# Altium PCB MCD_Rev2.PcbDoc (part 2 of 2)
Units mm, origin at the board's own origin, x right, y up, seen from the top; angles counter-clockwise.
Board outline 196.3 x 114.66 mm, 2 copper layers (F.Cu, B.Cu); 76 components, 120 nets, 473 pads, 223 vias.
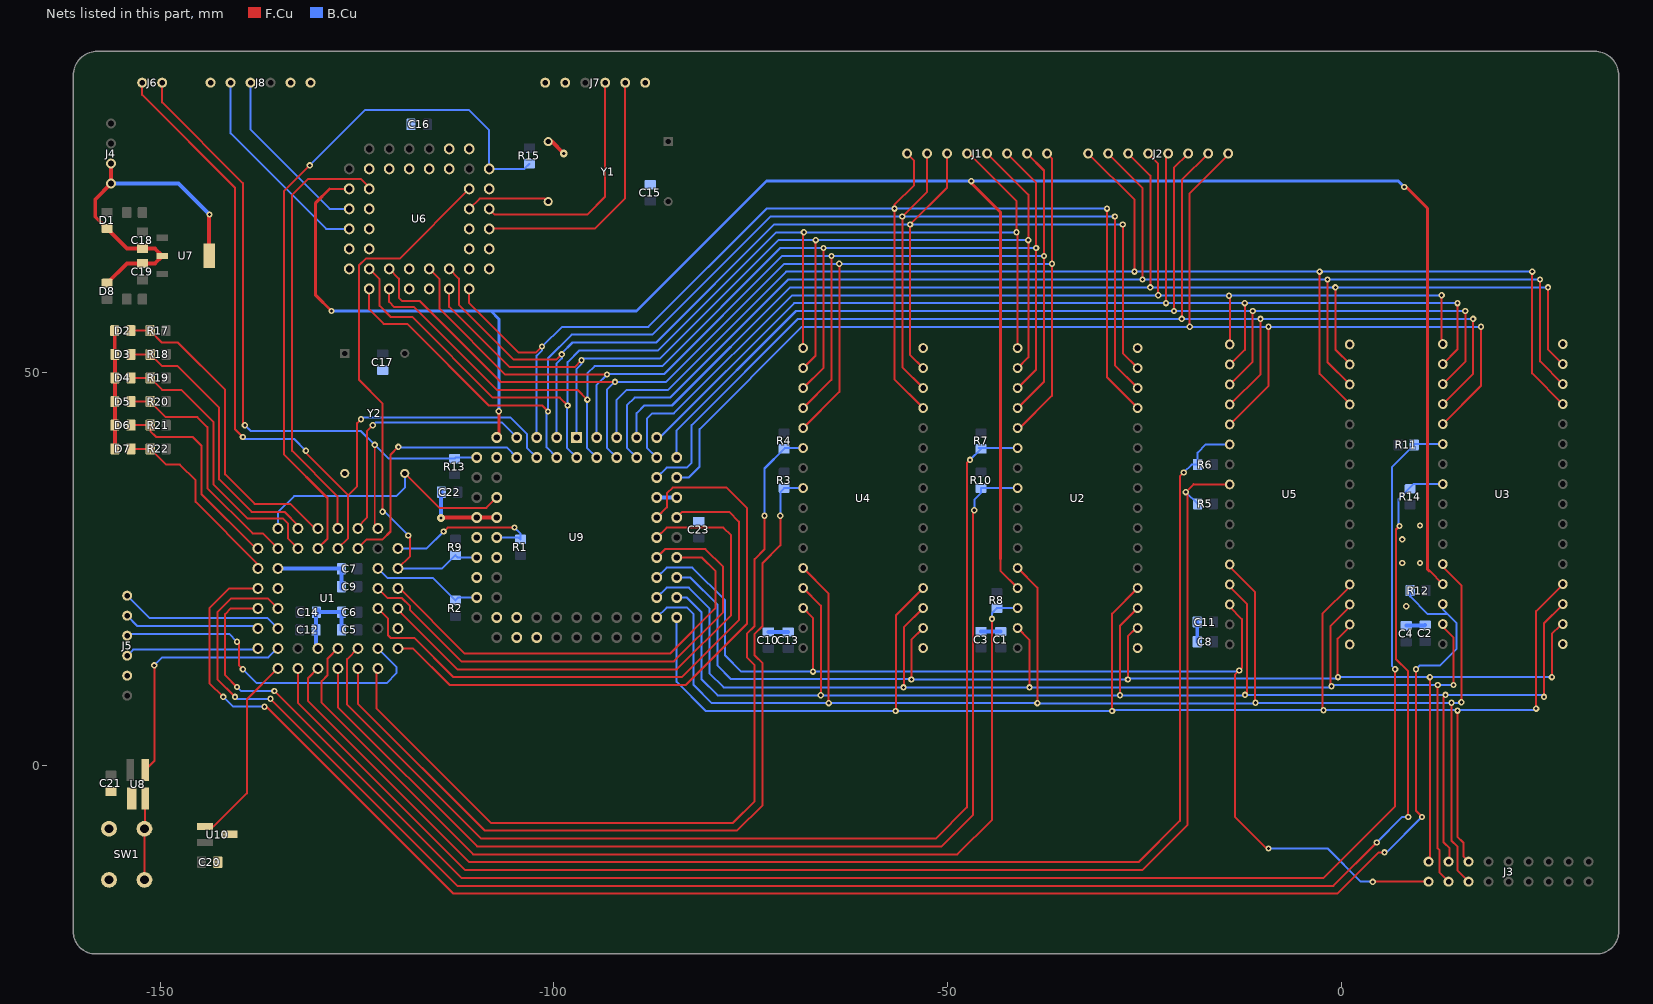
[diagram p2: the nets of this part, all layers, seen from the top]

## Via types
v1: diameter 0.8, hole 0.4, F.Cu to B.Cu, tented both sides, 206 vias
v2: diameter 1, hole 0.5, F.Cu to B.Cu, tented both sides, 13 vias
v3: diameter 1, hole 0.4, F.Cu to B.Cu, tented both sides, 4 vias

## Nets (pads, with @x,y where several pads share a name; then routed paths per layer and width w, separated by ;. In a path a pad name is that pad's centre, name@x,y a point inside that pad or via, vN(x,y) a via of type N, cw(c..) or ccw(c..) an arc to the next point about the centre after c; other vN are vias at no path point) (continued)
A13: J3.13 U2.4 U3.4 U4.4 U5.4 U9.44 | length 207
  F.Cu w0.25: v1(14.75,7) 14.75,-9 15.5,-9.75 15.5,-11.511 J3.13@16.17,-12.181
  F.Cu w0.254: v1(-56.6,6.95) -56.547,7.003 -56.547,19.123 U4.4@-53.1,22.57 ; v1(-29.1,6.95) -29.1,19.33 U2.4@-25.86,22.57 ; v1(-2.25,7.049) -2.394,7.193 -2.394,19.276 U5.4@1.053,22.723 ; v1(24.75,7.25) 24.75,19.63 U3.4@27.99,22.87
  B.Cu w0.254: U9.44@-84.399,18.83 -84.399,10.649 -80.7,6.95 v1(-56.6,6.95) v1(-29.1,6.95) -29.001,7.049 v1(-2.25,7.049) 14.701,7.049 v1(14.75,7) 14.799,7.049 24.549,7.049 v1(24.75,7.25)
A14: J3.14 U2.28 U3.28 U4.28 U5.28 U9.45 | length 210.4
  F.Cu w0.25: v1(14,8) 14,-9.5 14.75,-10.25 14.75,-13.301 J3.14@16.17,-14.721
  F.Cu w0.254: U4.28@-68.34,25.11 -65.1,21.87 v1(-65.1,7.95) ; U2.28@-41.1,25.11 -38.6,22.61 v1(-38.6,7.95) ; U5.28@-14.187,25.263 -10.947,22.023 -10.947,8.049 v1(-10.894,7.996) ; U3.28@12.75,25.41 15.25,22.91 v1(15.25,8.057)
  B.Cu w0.254: U9.45@-86.939,18.83 -85.693,20.077 -83.077,20.077 -82.25,19.25 -82.25,10.25 -79.95,7.95 v1(-65.1,7.95) v1(-38.6,7.95) -38.559,7.909 -10.981,7.909 v1(-10.894,7.996) 13.996,7.996 v1(14,8) 14.004,7.996 15.189,7.996 v1(15.25,8.057)
A15: J3.15 U2.3 U3.3 U4.29 U5.29 U9.46 | length 195.9
  F.Cu w0.25: v1(13.25,9.003) 13,8.754 13,-9.75 13.75,-10.5 13.75,-12.061 J3.15@13.63,-12.181
  F.Cu w0.254: U4.29@-68.34,22.57 -66.1,20.33 v1(-66.1,8.95) ; v1(-28.1,8.95) -28.1,17.79 U2.3@-25.86,20.03 ; U5.29@-14.187,22.723 -11.947,20.483 -11.947,9.274 v1(-12.218,9.003) ; v1(25.75,8.75) 25.75,18.09 U3.3@27.99,20.33
  B.Cu w0.254: U9.46@-84.399,21.37 -83.12,21.37 -81.25,19.5 -81.25,11 -79.2,8.95 v1(-66.1,8.95) v1(-28.1,8.95) -12.271,8.95 v1(-12.218,9.003) v1(13.25,9.003) 25.496,9.003 v1(25.75,8.75)
A16: J3.16 U2.31 U3.31 U4.3 U5.3 U9.47 | length 176
  F.Cu w0.25: v1(12.25,10.25) 12.25,-10.5 12.5,-10.75 12.5,-13.591 J3.16@13.63,-14.721
  F.Cu w0.254: v1(-55.6,9.95) -55.547,10.003 -55.547,17.583 U4.3@-53.1,20.03 ; U2.31@-41.1,17.49 -39.6,15.99 v1(-39.6,9.95) ; v1(-1.25,10.103) -1.394,10.247 -1.394,17.736 U5.3@1.053,20.183 ; U3.31@12.75,17.79 14.25,16.29 v1(14.25,10.25)
  B.Cu w0.254: U9.47@-86.939,21.37 -85.693,22.617 -82.867,22.617 -80.25,20 -80.25,11.75 -78.45,9.95 v1(-55.6,9.95) v1(-39.6,9.95) -1.403,9.95 v1(-1.25,10.103) -1.103,10.25 v1(12.25,10.25) v1(14.25,10.25)
A17: J3.17 U2.2 U3.2 U4.2 U5.2 U9.48 | length 173.2
  F.Cu w0.25: J3.17@11.09,-12.181 11.25,-12.021 v1(11.25,11.25)
  F.Cu w0.254: v1(-54.6,10.95) -54.6,15.99 U4.2@-53.1,17.49 ; v1(-27.1,10.95) -27.1,16.45 -26.06,17.49 U2.2@-25.86,17.49 ; v1(-0.416,11.25) -0.447,11.281 -0.447,16.143 U5.2@1.053,17.643 ; v1(26.75,11.25) 26.75,16.75 27.79,17.79 U3.2@27.99,17.79
  B.Cu w0.254: U9.48@-84.399,23.91 -82.66,23.91 -79.25,20.5 -79.25,12.75 -77.503,11.003 -54.653,11.003 v1(-54.6,10.95) v1(-27.1,10.95) -27.001,11.049 -0.617,11.049 v1(-0.416,11.25) v1(11.25,11.25) v1(26.75,11.25)
A18: J3.18 U4.30 U5.30 U9.49 | length 148.5
  F.Cu w0.25: v1(-12.947,12.103) -13.5,11.55 -13.5,-6.5 -9.5,-10.5 v1(-9.25,-10.5) ; v1(4,-14.75) 4.029,-14.721 J3.18@11.09,-14.721
  F.Cu w0.254: U4.30@-68.34,20.03 -67.1,18.79 v1(-67.1,11.95) ; U5.30@-14.187,20.183 -12.621,18.616 -12.621,12.429 v1(-12.947,12.103)
  B.Cu w0.25: v1(-9.25,-10.5) -1.75,-10.5 2.471,-14.721 3.971,-14.721 v1(4,-14.75)
  B.Cu w0.254: U9.49@-86.939,23.91 -85.693,25.157 -82.407,25.157 -78.25,21 -78.25,14 -76.2,11.95 v1(-67.1,11.95) -13.1,11.95 v1(-12.947,12.103)
A19: U1.35 U9.50 | length 56.5
  F.Cu w0.254: U1.35@-119.81,22.52 -119.567,22.52 -111.297,14.25 -85.25,14.25 -79.5,20 -79.5,24.75 -81.2,26.45 U9.50@-84.399,26.45
A20: U1.36 U9.51 | length 66.1
  F.Cu w0.254: U1.36@-122.35,22.52 -121.118,21.288 -119.288,21.288 -118.25,20.25 -118.25,19.75 -111.75,13.25 -84.75,13.25 -78.5,19.5 -78.5,25.25 -80.75,27.5 -85.889,27.5 U9.51@-86.939,26.45
A21: U1.33 U9.53 | length 68.9
  F.Cu w0.254: U1.33@-119.81,19.98 -119.81,19.81 -112.25,12.25 -84.375,12.25 -77.5,19.125 -77.5,29.25 -78.487,30.237 -85.693,30.237 U9.53@-86.939,28.99
A22: U1.34 U9.54 | length 74.9
  F.Cu w0.254: U1.34@-122.35,19.98 -121.042,18.672 -121.042,16.542 -120.75,16.25 -117.75,16.25 -112.75,11.25 -83.75,11.25 -76.5,18.5 -76.5,31 -77.75,32.25 -83.679,32.25 U9.54@-84.399,31.53
A23: U1.29 U9.55 | length 79.3
  F.Cu w0.254: U1.29@-119.81,14.9 -117.9,14.9 -113.25,10.25 -83.25,10.25 -75.5,18 -75.5,32.75 -78.067,35.317 -84.916,35.317 -85.646,34.586 -85.646,32.823 U9.55@-86.939,31.53
AS: J6.1 U1.1 U9.6 | length 110.8
  F.Cu w0.254: J6.1@-152.29,86.75 -152.29,85.19 -140.5,73.4 -140.5,42.75 v1(-139.5,41.75) ; v1(-131.5,40) -131.5,39.75 -126.122,34.372 -126.122,33.628 ; U1.1@-127.43,27.6 -126.122,28.908 -126.122,33.628 ; v1(-124.5,44) -125,43.5 -125,35.5 -126.122,34.378 -126.122,33.628
  B.Cu w0.254: v1(-139.5,41.75) -139.25,41.5 -133,41.5 v1(-131.5,40) ; v1(-124.5,44) -124.25,44.25 -105.517,44.25 -103.426,42.159 -103.426,40.397 U9.6@-102.179,39.15
BERR: R2.2 U1.38 U9.24 | length 14.4
  B.Cu w0.254: U1.38@-122.35,25.06 -121.118,23.828 -115.328,23.828 R2.2@-112.5,21 -112.13,21.37 U9.24@-109.799,21.37
BRESET: U1.19 U8.3 | length 30.4
  F.Cu w0.254: U8.3@-151.9,-0.55 -150.75,0.6 v1(-150.75,12.75)
  B.Cu w0.254: v1(-150.75,12.75) -149.75,13.75 -136.25,13.75 -135.1,14.9 U1.19@-135.05,14.9
CLK: U1.6 U9.15 Y2.8 | length 35.3
  F.Cu w0.25: Y2.8@-118.94,37.13 -114.56,32.75 -108.579,32.75 U9.15@-107.259,34.07
  B.Cu w0.254: U1.6@-135.05,30.14 -135.05,32.2 -133,34.25 -120,34.25 -118.94,35.31 Y2.8@-118.94,37.13
CPLD_DTACK: J6.2 R13.2 U1.40 U9.10 | length 89.9
  F.Cu w0.25: -139.5,60.5 -139.5,43.5 v1(-139.25,43.25) ; v1(-122.75,40.75) -122.75,30.54 U1.40@-122.35,30.14
  F.Cu w0.254: J6.2@-149.75,86.75 -149.75,84.25 -139.5,74 -139.5,60.5
  B.Cu w0.25: v1(-139.25,43.25) -138.514,42.514 -124.514,42.514 v1(-122.75,40.75)
  B.Cu w0.254: v1(-122.75,40.75) -120.99,38.99 R13.2@-112.599,38.99 -112.439,39.15 U9.10@-109.799,39.15
D0: J1.1 U2.13 U4.13 U6.28 U9.5 | length 167
  F.Cu w0.254: U6.28@-110.75,60.56 -110.75,58.75 -104.5,52.5 -102.25,52.5 v1(-101.5,53.25) ; J1.1@-55.14,77.75 -54.25,76.86 -54.25,73.75 -56.75,71.25 v1(-56.75,70.75) -56.75,49.08 U4.13@-53.1,45.43 ; v1(-29.75,70.75) -29.75,49.32 U2.13@-25.86,45.43
  B.Cu w0.254: U9.5@-102.179,41.69 -102.179,52.071 -101.5,52.75 v1(-101.5,53.25) -101.449,53.25 -98.949,55.75 -88,55.75 -73,70.75 v1(-56.75,70.75) v1(-29.75,70.75)
D1: J1.2 U2.14 U4.14 U6.18 U9.4 | length 178.5
  F.Cu w0.254: U6.18@-123.45,60.56 -123.45,57.95 -121.625,56.125 -118.625,56.125 -108.25,45.75 -101.5,45.75 v1(-100.75,45) ; U4.14@-53.1,47.97 -55.75,50.62 v1(-55.75,69.75) -52.6,72.9 J1.2@-52.6,77.75 ; v1(-28.75,69.75) -28.75,50.86 U2.14@-25.86,47.97
  B.Cu w0.254: U9.4@-99.639,39.15 -100.933,40.443 -100.933,44.817 v1(-100.75,45) -100.75,51.75 -97.75,54.75 -87.5,54.75 -72.5,69.75 v1(-55.75,69.75) v1(-28.75,69.75)
D2: J1.3 U2.15 U4.15 U6.27 U9.3 | length 159.2
  F.Cu w0.254: U6.27@-113.29,63.1 -112.058,61.868 -112.058,58.558 -105.073,51.573 -99.677,51.573 v1(-99,52.25) ; U4.15@-53.1,50.51 -54.75,52.16 v1(-54.75,68.75) -50.06,73.44 J1.3@-50.06,77.75 ; v1(-27.75,68.75) -27.75,52.4 U2.15@-25.86,50.51
  B.Cu w0.254: U9.3@-99.639,41.69 -99.639,51.111 -99,51.75 v1(-99,52.25) -99,52.384 -97.634,53.75 -87,53.75 -72,68.75 v1(-54.75,68.75) v1(-27.75,68.75)
D3: J1.4 U2.17 U4.17 U6.19 U9.2 | length 153.1
  F.Cu w0.254: U6.19@-123.45,63.1 -122.142,61.792 -122.142,58.392 -120.75,57 -118,57 -107.75,46.75 -99.25,46.75 v1(-98.25,45.75) ; U4.17@-68.34,53.05 -68.34,67.66 v1(-68.25,67.75) ; J1.4@-47.52,77.75 -47.25,77.75 -41.25,71.75 v1(-41.25,67.75) -41.1,67.6 U2.17@-41.1,53.05
  B.Cu w0.254: U9.2@-97.099,39.15 -98.346,40.397 -98.346,45.654 v1(-98.25,45.75) -98.25,51.25 -96.75,52.75 -86.75,52.75 -71.75,67.75 v1(-68.25,67.75) v1(-41.25,67.75)
D4: J1.5 U2.18 U4.18 U6.26 U9.1 | length 142.6
  F.Cu w0.254: U6.26@-113.29,60.56 -113.29,58.29 -105.627,50.627 -97.373,50.627 v1(-96.5,51.5) ; U4.18@-68.34,50.51 -66.75,52.1 v1(-66.75,66.75) ; J1.5@-44.98,77.75 -39.75,72.52 v1(-39.75,66.75) -39.75,51.86 U2.18@-41.1,50.51
  B.Cu w0.254: U9.1@-97.099,41.69 -97.099,50.401 -96.5,51 v1(-96.5,51.5) -96.25,51.75 -86.5,51.75 -71.5,66.75 v1(-66.75,66.75) v1(-39.75,66.75)
D5: J1.6 U2.19 U4.19 U6.20 U9.68 | length 157.9
  F.Cu w0.254: U6.20@-120.91,60.56 -120.91,58.91 -120.25,58.25 -117.75,58.25 -107.25,47.75 -97,47.75 v1(-95.75,46.5) ; U4.19@-68.34,47.97 -65.75,50.56 v1(-65.75,65.75) ; J1.6@-42.44,77.75 -38.75,74.06 v1(-38.75,65.75) -38.75,50.32 U2.19@-41.1,47.97
  B.Cu w0.254: U9.68@-94.559,39.15 -95.806,40.397 -95.806,46.444 v1(-95.75,46.5) -95.75,49.829 -94.829,50.75 -86.25,50.75 -71.25,65.75 v1(-65.75,65.75) v1(-38.75,65.75)
D6: J1.7 U2.20 U4.20 U6.25 U9.67 | length 156
  F.Cu w0.254: U6.25@-115.83,63.1 -114.522,61.792 -114.522,58.022 -106.18,49.681 v1(-93.25,49.681) ; U4.20@-68.34,45.43 -64.75,49.02 v1(-64.75,64.75) ; U2.20@-41.1,45.43 -41.07,45.43 -37.75,48.75 v1(-37.75,64.75) -37.75,75.6 J1.7@-39.9,77.75
  B.Cu w0.254: U9.67@-94.559,41.69 -94.559,48.371 v1(-93.25,49.681) -93.18,49.75 -86,49.75 -71,64.75 v1(-64.75,64.75) v1(-37.75,64.75)
D7: J1.8 U2.21 U4.21 U6.21 U9.66 | length 168.1
  F.Cu w0.254: U6.21@-120.91,63.1 -119.678,61.868 -119.678,59.428 -119.25,59 -117,59 -106.734,48.734 -92.266,48.734 v1(-92.25,48.75) ; U4.21@-68.34,42.89 -63.75,47.48 v1(-63.75,63.75) ; U2.21@-41.1,42.89 -40.832,42.89 -36.75,46.972 v1(-36.75,63.75) -36.75,77.14 J1.8@-37.36,77.75
  B.Cu w0.254: U9.66@-92.019,39.15 -93.266,40.397 -93.266,47.734 v1(-92.25,48.75) -85.75,48.75 -70.75,63.75 v1(-63.75,63.75) v1(-36.75,63.75)
D8: J2.1 U3.13 U5.13 U9.65 | length 182.1
  F.Cu w0.254: J2.1@-32.14,77.75 -26.25,71.86 v1(-26.25,62.75) ; v1(-2.75,62.75) -2.75,49.78 U5.13@1.14,45.89 ; v1(24.25,62.75) 24.25,49.82 U3.13@28.14,45.93
  B.Cu w0.254: U9.65@-92.019,41.69 -92.019,46.481 -90.75,47.75 -85.5,47.75 -70.5,62.75 v1(-26.25,62.75) v1(-2.75,62.75) v1(24.25,62.75)
D9: J2.2 U3.14 U5.14 U9.64 | length 176.5
  F.Cu w0.254: J2.2@-29.6,77.75 -25.25,73.4 v1(-25.25,61.75) ; v1(-1.75,61.75) -1.75,51.25 U5.14@1.07,48.43 ; v1(25.25,61.75) 25.25,51.36 U3.14@28.14,48.47
  B.Cu w0.254: U9.64@-89.479,39.15 -90.726,40.397 -90.726,45.774 -89.75,46.75 -85.25,46.75 -70.25,61.75 v1(-25.25,61.75) v1(-1.75,61.75) v1(25.25,61.75)
D10: J2.3 U3.15 U5.15 U9.63 | length 164.7
  F.Cu w0.254: J2.3@-27.06,77.75 -24.25,74.94 v1(-24.25,60.75) ; v1(-0.75,60.75) -0.75,52.86 U5.15@1.14,50.97 ; v1(26.25,60.75) 26.25,52.9 U3.15@28.14,51.01
  B.Cu w0.254: U9.63@-89.479,41.69 -89.479,44.771 -88.5,45.75 -85,45.75 -70,60.75 v1(-24.25,60.75) v1(-0.75,60.75) v1(26.25,60.75)
D11: J2.4 U3.17 U5.17 U9.62 | length 143.9
  F.Cu w0.254: J2.4@-24.52,77.75 -23.25,76.48 v1(-23.25,59.75) ; v1(-14.25,59.696) -14.1,59.547 U5.17@-14.1,53.51 ; v1(12.75,59.75) 12.75,53.7 U3.17@12.9,53.55
  B.Cu w0.254: U9.62@-86.939,39.15 -88.186,40.397 -88.186,44.064 -87.5,44.75 -84.75,44.75 -69.75,59.75 v1(-23.25,59.75) -14.303,59.75 v1(-14.25,59.696) 12.696,59.696 v1(12.75,59.75)
D12: J2.5 U3.18 U5.18 U9.61 | length 144.9
  F.Cu w0.254: v1(-22.25,58.75) -22.25,77.48 J2.5@-21.98,77.75 ; U5.18@-14.1,50.97 -12.25,52.82 v1(-12.25,58.75) ; U3.18@12.9,51.01 14.75,52.86 v1(14.75,58.75)
  B.Cu w0.254: U9.61@-86.939,41.69 -86.56,41.69 -69.5,58.75 v1(-22.25,58.75) v1(-12.25,58.75) v1(14.75,58.75)
D13: J2.6 U3.19 U5.19 U9.60 | length 151.6
  F.Cu w0.254: v1(-21.25,57.75) -21.25,75.94 J2.6@-19.44,77.75 ; U5.19@-14.1,48.43 -11.25,51.28 v1(-11.25,57.75) ; U3.19@12.9,48.47 15.75,51.32 v1(15.75,57.75)
  B.Cu w0.254: U9.60@-84.399,39.15 -84.399,42.601 -69.25,57.75 v1(-21.25,57.75) v1(-11.25,57.75) -0.75,57.75 v1(15.75,57.75)
D14: J2.7 U3.20 U5.20 U9.59 | length 162.1
  F.Cu w0.254: v1(-20.25,56.75) -20.25,74.4 J2.7@-16.9,77.75 ; U5.20@-14.1,45.89 -10.25,49.74 v1(-10.25,56.75) ; U3.20@12.9,45.93 16.75,49.78 v1(16.75,56.75)
  B.Cu w0.254: U9.59@-86.939,36.61 -85.693,37.857 -83.143,37.857 -82.5,38.5 -82.5,43.25 -69,56.75 v1(-20.25,56.75) v1(-10.25,56.75) v1(16.75,56.75)
D15: J2.8 U3.21 U5.21 U9.58 | length 165.7
  F.Cu w0.254: v1(-19.25,55.75) -19.25,72.695 -14.36,77.585 J2.8@-14.36,77.75 ; U5.21@-14.1,43.35 -9.25,48.2 v1(-9.25,55.75) ; U3.21@12.9,43.39 17.75,48.24 v1(17.75,55.75)
  B.Cu w0.254: U9.58@-84.399,36.61 -82.89,36.61 -81.5,38 -81.5,42.75 -68.5,55.75 v1(-19.25,55.75) v1(-9.25,55.75) v1(17.75,55.75)
DUART_CLK: U6.36 Y1.8 | length 10.7
  F.Cu w0.254: U6.36@-110.75,70.72 -109.442,72.028 -101.108,72.028 Y1.8@-100.72,71.64
DUART_DTACK: U1.44 U6.10 | length 55.8
  F.Cu w0.254: U1.44@-127.43,30.14 -127.5,30.21 -127.5,34.25 -133.25,40 -133.25,72.5 -131.258,74.492 -124.492,74.492 U6.10@-123.45,73.45
DUARTCS: R15.2 U1.3 U6.39 | length 89.8
  F.Cu w0.254: v1(-131,76.25) -134.25,73 -134.25,39.5 -128.75,34 -128.75,28.82 U1.3@-129.97,27.6
  B.Cu w0.254: v1(-131,76.25) -124,83.25 -110.75,83.25 -108.21,80.71 U6.39@-108.21,75.8 -103.75,75.8 R15.2@-103.1,76.45
GND: C1.2 C2.2 C3.2 C4.2 C5.2 C6.2 C7.2 C8.2 C9.2 C10.2 C11.2 C12.2 C13.2 C14.2 C15.2 C16.2 C17.2 C18.2 C19.2 C20.2 C21.2 C22.2 C23.2 D1.1 D2.1 D3.1 D4.1 D5.1 D6.1 D7.1 D8.1 J4.3 J4.4 J5.2 J7.1 J8.1 SW1.1 U1.10 U1.23 U1.31 U2.16 U3.16 U4.16 U5.16 U6.22 U7.2 U7.4 U8.1 U9.16 U9.17 U9.56 U9.57 U10.3 Y1.7 Y2.7 | length 108.9
  F.Cu w0.5: D8.1@-156.75,61.275 -154.237,63.788 C19.2@-152.25,63.788 -150.687,63.788 U7.2@-149.724,64.75 -150.687,65.713 C18.2@-152.25,65.713 -154.237,65.713 D1.1@-156.75,68.225 -158.25,69.725 -158.25,71.94 J4.4@-156.25,73.94 J4.3@-156.25,76.48 ; D2.1@-155.775,55.25 -155.775,52.275 D3.1@-155.75,52.25 D4.1@-155.75,49.25 D5.1@-155.75,46.25 -155.75,44.25 ; D7.1@-155.75,40.25 -155.75,44.25 ; D6.1@-155.75,43.25 -155.75,44.25 ; U7.4@-143.776,64.75 -143.776,69.974 v1(-143.75,70) ; v3(-114.35,31.45) -114.27,31.53 U9.16@-109.799,31.53 U9.17@-107.259,31.53 ; Y1.7@-100.72,79.26 -100.26,79.26 v3(-98.75,77.75)
  B.Cu w0.5: J4.4@-156.25,73.94 -147.69,73.94 -144.5,70.75 v1(-143.75,70) ; U1.10@-135.05,25.06 -127.048,25.06 C7.2@-126.988,25 C9.2@-126.988,22.5 ; C14.2@-130.2,19.75 C12.2@-130.2,17.25 -130.2,15.13 U1.23@-129.97,14.9 ; C14.2@-129.875,19.788 C14.2@-130.162,19.5 C6.2@-126.965,19.5 C5.2@-126.965,17.25 ; v3(-114.35,31.45) -114.35,34.687 C22.2@-114.288,34.75 ; U9.57@-86.939,34.07 U9.56@-84.399,34.07 ; C10.2@-72.75,17 C13.2@-70.25,17 ; C3.2@-45.75,17.038 C1.2@-43.25,17.038 ; C8.2@-18.287,15.75 C11.2@-18.287,18.25 ; C4.2@8.25,17.788 10.587,17.788 C2.2@10.65,17.85
  other v1: 8.25,20.25 7.75,25.75 10,25.75 7.75,28.75 10,30.5
HALT: R1.2 U1.39 U9.19 | length 20.8
  F.Cu w0.254: v1(-114,29.75) -113.5,30.25 v1(-105,30.25)
  B.Cu w0.254: U1.39@-119.81,27.6 -116.15,27.6 v1(-114,29.75) ; U9.19@-107.259,28.99 -104.49,28.99 R1.2@-104.25,28.75 -104.25,29.5 v1(-105,30.25)
LDS: U1.43 U9.8 | length 31.8
  F.Cu w0.254: U1.43@-124.89,27.6 -123.74,28.75 -121.75,28.75 -120.75,29.75 -120.75,39.5 v1(-119.75,40.5)
  B.Cu w0.254: v1(-119.75,40.5) -119.693,40.443 -106.013,40.443 U9.8@-104.719,39.15
LED0: D2.2 R17.2 U1.2 | length 40.4
  F.Cu w0.254: D2.2@-153.725,55.25 R17.2@-151.275,55.25 -149.775,53.75 -147.77,53.75 -141.75,47.73 -141.75,37 -138,33.25 -133.5,33.25 -130.39,30.14 U1.2@-129.97,30.14
LED1: D3.2 R18.2 U1.4 | length 35.9
  F.Cu w0.254: D3.2@-153.7,52.25 R18.2@-151.25,52.25 -149.75,50.75 -147.77,50.75 -142.5,45.48 -142.5,36.375 -138.375,32.25 -134.215,32.25 -132.51,30.545 U1.4@-132.51,30.14
LED2: D4.2 R19.2 U1.5 | length 35.9
  F.Cu w0.254: D4.2@-153.7,49.25 R19.2@-151.25,49.25 -149.75,47.75 -147.331,47.75 -143.25,43.669 -143.25,35.75 -138.875,31.375 -134.375,31.375 -133.75,30.75 -133.75,28.84 U1.5@-132.51,27.6
LED3: D5.2 R20.2 U1.8 | length 30.9
  F.Cu w0.254: D5.2@-153.7,46.25 R20.2@-151.25,46.25 -149.277,44.277 -145.277,44.277 -144,43 -144,35.25 -138.25,29.5 -136.95,29.5 U1.8@-135.05,27.6
LED4: D6.2 R21.2 U1.7 | length 26.6
  F.Cu w0.254: D6.2@-153.7,43.25 R21.2@-151.25,43.25 -151.25,42.503 -150.497,41.75 -145.864,41.75 -144.75,40.636 -144.75,34.5 -137.85,27.6 U1.7@-137.59,27.6
LED5: D7.2 R22.2 U1.9 | length 24.3
  F.Cu w0.254: D7.2@-153.7,40.25 R22.2@-151.25,40.25 -149.25,38.25 -147.5,38.25 -145.5,36.25 -145.5,33.5 -137.59,25.59 U1.9@-137.59,25.06
RAMHCE: R11.2 U1.13 U3.22 | length 226.2
  F.Cu w0.25: v1(-140.25,10) -141.75,11.5 -141.75,19.25 -141.02,19.98 U1.13@-137.59,19.98 ; v1(-135.5,9.5) -111.75,-14.25 -2.25,-14.25 6.847,-5.153 v1(6.847,12.25)
  B.Cu w0.25: v1(-140.25,10) -139.75,9.5 v1(-135.5,9.5)
  B.Cu w0.254: v1(6.847,12.25) 6.45,12.646 6.45,37.95 R11.2@9.25,40.75 9.35,40.85 U3.22@12.9,40.85
RAMHCE2: R12.2 U1.11 U3.30 | length 223.9
  F.Cu w0.25: v1(-142,8.75) -143.75,10.5 -143.75,20 -141.23,22.52 U1.11@-137.59,22.52 ; v1(-136.75,7.5) -136.5,7.5 -112.75,-16.25 -110,-16.25
  F.Cu w0.254: -110,-16.25 -0.5,-16.25 4.75,-11 v1(5.5,-11) ; v1(9.5,12.25) 9.5,-5.75 v1(10.25,-6.5)
  B.Cu w0.25: v1(-142,8.75) -140.75,7.5 v1(-136.75,7.5)
  B.Cu w0.254: v1(5.5,-11) 5.75,-11 v1(10.25,-6.5) ; R12.2@8.75,22.25 8.75,21.5 11,19.25 13.5,19.25 ; v1(9.5,12.25) 10,12.75 12.55,12.75 14.65,14.85 14.65,18.1 13.5,19.25 ; U3.30@12.9,20.53 12.9,19.85 13.5,19.25
RAMHOE: R14.2 U1.14 U3.24 | length 230.9
  F.Cu w0.25: v1(-140.5,8.75) -142.75,11 -142.75,19.5 -141,21.25 -136.32,21.25 U1.14@-135.05,19.98 ; v1(-136,8.5) -112.25,-15.25
  F.Cu w0.254: -112.25,-15.25 -1,-15.25 v1(4.5,-9.75) ; v1(7.397,30.45) 6.95,30.004 6.95,13.55 8.5,12 v1(8.5,-6.5)
  B.Cu w0.25: v1(-140.5,8.75) -140.25,8.5 v1(-136,8.5)
  B.Cu w0.254: v1(4.5,-9.75) 7.75,-6.5 v1(8.5,-6.5) ; v1(7.397,30.45) 7.25,30.596 7.25,33.85 9.17,35.77 U3.24@12.9,35.77
RAMLCE: R7.2 U1.27 U2.22 | length 146.4
  F.Cu w0.254: U1.27@-124.89,14.9 -126.25,13.54 -126.25,7.75 -109.25,-9.25 -51.5,-9.25 -47.55,-5.3 -47.55,38.45 v1(-47.15,38.85)
  B.Cu w0.254: v1(-47.15,38.85) R7.2@-45.75,40.25 ; R7.2@-46.1,40.35 U2.22@-41.1,40.35
RAMLCE2: R8.2 U1.25 U2.30 | length 132.5
  F.Cu w0.254: U1.25@-127.43,14.9 -128.75,13.58 -128.75,11.5 -129.5,10.75 -129.5,8 -110.25,-11.25 -48.75,-11.25 -44.35,-6.85 v1(-44.35,18.65)
  B.Cu w0.254: v1(-44.35,18.65) -44.35,19.4 R8.2@-43.75,20 -43.72,20.03 U2.30@-41.1,20.03
RAMLOE: R10.2 U1.24 U2.24 | length 141.1
  F.Cu w0.254: U1.24@-127.43,12.36 -127.43,7.43 -109.75,-10.25 -50.75,-10.25 -46.75,-6.25 -46.75,32.304 v1(-46.604,32.45)
  B.Cu w0.254: v1(-46.604,32.45) -46.604,33.797 -45.75,34.65 R10.2@-45.75,35.25 ; R10.2@-45.73,35.27 U2.24@-41.1,35.27
RESET: R9.2 U1.37 U6.38 U9.20 | length 70.8
  F.Cu w0.254: v1(-121.75,32.25) -121.75,46 -124.75,49 -124.75,63.543 -123.885,64.408 -119.602,64.408 U6.38@-110.75,73.26 ; U1.37@-119.81,25.06 -118.25,26.62 -118.25,29 v1(-118.5,29.25)
  B.Cu w0.254: v1(-121.75,32.25) -121.5,32.25 v1(-118.5,29.25) ; U1.37@-119.81,25.06 -114.19,25.06 R9.2@-112.5,26.75 -112.2,26.45 U9.20@-109.799,26.45
ROMHCE: R6.2 U1.22 U5.22 | length 178.8
  F.Cu w0.254: U1.22@-129.97,12.36 -131.25,11.08 -131.25,8.25 -110.75,-12.25 -25.75,-12.25 -20.5,-7 -20.5,36.75 v1(-20,37.25)
  B.Cu w0.254: v1(-20,37.25) -19,38.25 R6.2@-18.25,38.25 -18.25,39.75 -17.19,40.81 U5.22@-14.1,40.81
ROMHOE: R5.2 U1.20 U5.24 | length 179.1
  F.Cu w0.254: U1.20@-132.51,12.36 -132.51,8.01 -111.25,-13.25 -25.25,-13.25 -19.5,-7.5 -19.5,34.5 v1(-19.75,34.75) -18.75,35.75 -18.73,35.73 U5.24@-14.1,35.73
  B.Cu w0.254: v1(-19.75,34.75) R5.2@-18.25,33.25
ROMLCE: R4.2 U1.28 U4.22 | length 109.9
  F.Cu w0.254: U1.28@-122.35,12.36 -122.5,12.21 -122.5,7.25 -108,-7.25 -77.25,-7.25 -74.5,-4.5 -74.5,12.75 -75.5,13.75 -75.5,16.75 -74.5,17.75 -74.5,26.25 -73.25,27.5 v1(-73.25,31.75)
  B.Cu w0.254: v1(-73.25,31.75) -73.25,37.75 R4.2@-70.75,40.25 -70.65,40.35 U4.22@-68.34,40.35
ROMLOE: R3.2 U1.26 U4.24 | length 108.5
  F.Cu w0.254: U1.26@-124.89,12.36 -124.89,7.89 -108.75,-8.25 -76.75,-8.25 -73.5,-5 -73.5,13 -74.5,14 -74.5,16.75 -73.5,17.75 -73.5,25.75 -71.25,28 v1(-71.25,31.75)
  B.Cu w0.254: v1(-71.25,31.75) -71.25,34.75 R3.2@-70.75,35.25 -70.73,35.27 U4.24@-68.34,35.27
RXDA: J7.5 U6.33 | length 33.6
  F.Cu w0.254: U6.33@-108.21,68.18 -108.14,68.25 -94.75,68.25 -90.94,72.06 J7.5@-90.94,86.75
RXDB: J8.5 U6.13 | length 26.5
  B.Cu w0.25: J8.5@-141.06,86.75 -141.06,80.31 -128.93,68.18 U6.13@-125.99,68.18
R{slash}W: U2.29 U3.29 U6.9 U9.9 | length 286.3
  F.Cu w0.25: -128.5,73.25 -128.49,73.26 U6.9@-125.99,73.26
  F.Cu w0.254: -43.25,26.25 -43.25,24.72 U2.29@-41.1,22.57 ; 11.15,24.75 11.22,24.75 U3.29@12.9,23.07
  F.Cu w0.381: -128.5,73.25 -130.25,71.5 -130.25,59.75 v1(-128.25,57.75) ; U9.9@-107.259,41.69 -107,41.949 v1(-107,45.024) ; v1(-47,74.25) -47,74 -43.25,70.25 -43.25,26.25 ; v1(8,73.5) 8.25,73.5 10.95,70.8 10.95,24.95 11.15,24.75
  B.Cu w0.381: v1(-128.25,57.75) -108,57.75 ; v1(-107,45.024) -107,54.75 -107,56.75 -108,57.75 ; v1(8,73.5) 7.25,74.25 v1(-47,74.25) -73,74.25 -89.5,57.75 -108,57.75
SRESET: U1.18 U10.1 | length 24.6
  F.Cu w0.25: U10.1@-144.325,-7.734 -143.234,-7.734 -139,-3.5 -139,8.41 U1.18@-135.05,12.36
SW_IN: SW1.2 U8.2 | length 10.4
  F.Cu w0.254: SW1.2@-152,-14.5 SW1.2@-152,-8 -151.9,-7.9 U8.2@-151.9,-4.15
TCK: J5.3 U1.17 | length 17
  B.Cu w0.254: J5.3@-154.2,13.98 -153.43,14.75 -137.74,14.75 U1.17@-137.59,14.9
TDI: J5.5 U1.15 | length 17.3
  B.Cu w0.254: J5.5@-154.2,19.06 -152.89,17.75 -137.9,17.75 U1.15@-137.59,17.44
TDO: J5.4 U1.30 | length 43.1
  F.Cu w0.254: v1(-140.25,15.75) -140,15.5 -140,12.75 v1(-139.5,12.25)
  B.Cu w0.254: J5.4@-154.2,16.52 -153.97,16.75 -141.25,16.75 v1(-140.25,15.75) ; v1(-139.5,12.25) -137.75,10.5 -121.25,10.5 -120,11.75 -120,12.55 U1.30@-122.35,14.9
TMS: J5.6 U1.16 | length 20.9
  B.Cu w0.254: J5.6@-154.2,21.6 -151.348,18.748 -136.358,18.748 U1.16@-135.05,17.44
TXDA: J7.4 U6.35 | length 30.4
  F.Cu w0.254: U6.35@-108.21,70.72 -107.49,70 -95.75,70 -93.52,72.23 J7.4@-93.52,86.75
TXDB: J8.4 U6.11 | length 22.7
  B.Cu w0.25: J8.4@-138.52,86.75 -138.52,80.77 -128.47,70.72 U6.11@-125.99,70.72
UDS: U1.42 U9.7 | length 33
  F.Cu w0.254: U1.42@-125,30.25 -123.75,31.5 -123.75,42.5 v1(-123,43.25)
  B.Cu w0.254: v1(-123,43.25) -122.674,43.576 -106.576,43.576 -104.719,41.719 U9.7@-104.719,41.69
unconnected-(J7-Pad2): J7.2
unconnected-(J7-Pad6): J7.6
unconnected-(J8-Pad2): J8.2
unconnected-(J8-Pad6): J8.6
unconnected-(U1-Pad12): U1.12
unconnected-(U2-Pad1): U2.1
unconnected-(U3-Pad1): U3.1
unconnected-(U4-Pad1): U4.1
unconnected-(U5-Pad1): U5.1
unconnected-(U6-Pad1): U6.1
unconnected-(U6-Pad3): U6.3
unconnected-(U6-Pad5): U6.5
unconnected-(U6-Pad8): U6.8
unconnected-(U6-Pad12): U6.12
unconnected-(U6-Pad14): U6.14
unconnected-(U6-Pad15): U6.15
unconnected-(U6-Pad16): U6.16
unconnected-(U6-Pad17): U6.17
unconnected-(U6-Pad23): U6.23
unconnected-(U6-Pad24): U6.24
unconnected-(U6-Pad29): U6.29
unconnected-(U6-Pad30): U6.30
unconnected-(U6-Pad31): U6.31
unconnected-(U6-Pad32): U6.32
unconnected-(U6-Pad34): U6.34
unconnected-(U6-Pad37): U6.37
unconnected-(U6-Pad40): U6.40
unconnected-(U6-Pad42): U6.42
unconnected-(U6-Pad43): U6.43
unconnected-(U9-Pad11): U9.11
unconnected-(U9-Pad18): U9.18
unconnected-(U9-Pad21): U9.21
unconnected-(U9-Pad22): U9.22
unconnected-(U9-Pad28): U9.28
unconnected-(U9-Pad29): U9.29
unconnected-(U9-Pad30): U9.30
unconnected-(U9-Pad31): U9.31
pads on no net: Y1.1 Y2.1

## Polygon pours and split planes (outlines as drawn)
GND on F.Cu "F.Cu-GND" (solid, remove dead copper, pour order 0): 35.042,-18.692 -161.457,-18.992 -161.449,91 35.051,91
GND on B.Cu "B.Cu-GND" (solid, remove dead copper, pour order 1): 35.042,-18.692 -161.457,-18.992 -161.449,91 35.051,91

## Keep-outs
Edge.Cuts:
  lines w0.1: -161.05,-21.05 ccw(c-158.19,-21.05) -157.95,-23.9 ; -161.05,-21.05 ccw(c-158.19,-21.05) -157.95,-23.9 ; -161.05,-21.05 -161.05,87.65 ; -161.05,-21.05 -161.05,87.65 ; -161.05,87.65 cw(c-157.95,87.65) -157.95,90.75 ; -161.05,87.65 cw(c-157.95,87.65) -157.95,90.75 ; -157.95,-23.9 32.15,-23.9 ; -157.95,-23.9 32.15,-23.9 ; -157.95,90.75 32.15,90.75 ; -157.95,90.75 32.15,90.75 ; 32.15,-23.9 ccw(c32.39,-21.05) 35.25,-21.05 ; 32.15,-23.9 ccw(c32.39,-21.05) 35.25,-21.05 ; 32.15,90.75 cw(c32.15,87.65) 35.25,87.65 ; 32.15,90.75 cw(c32.15,87.65) 35.25,87.65 ; 35.25,-21.05 35.25,87.65 ; 35.25,-21.05 35.25,87.65

## Silkscreen, mask and mechanical layers (free items; w line width, h text height)
F.SilkS:
  text "TXA" at -93.241,89.137 h0.75 r90
  text "RXA" at -90.741,89.136 h0.75 r90
  text "GND" at -131.237,89.084 h0.75 r90
  text "GND" at -101.137,89.084 h0.75 r90
  text "RXB" at -140.742,89.035 h0.75 r90
  text "TXB" at -138.142,89.036 h0.75 r90
  text "+5V" at -135.739,88.961 h0.75 r90
  text "+5V" at -95.939,88.961 h0.75 r90
  text "AS" at -152.7,88.566 h1
  text "DTACK" at -149.463,88.566 h1
  text "DUART CHANNEL A" at -95.602,83.766 h1
  text "D11" at -24.223,81.105 h1 r90
  text "D12" at -21.72,81.069 h1 r90
  text "D13" at -19.215,81.076 h1 r90
  text "D15" at -14.218,81.071 h1 r90
  text "D10" at -26.715,81.063 h1 r90
  text "D14" at -16.72,81.064 h1 r90
  text "+3V3" at -159.933,80.836 h0.75
  text "D1" at -52.223,80.757 h1 r90
  text "D0" at -54.715,80.714 h1 r90
  text "D2" at -49.72,80.721 h1 r90
  text "D3" at -47.215,80.728 h1 r90
  text "D4" at -44.72,80.716 h1 r90
  text "D5" at -42.218,80.722 h1 r90
  text "D6" at -39.718,80.714 h1 r90
  text "D7" at -37.218,80.718 h1 r90
  text "D8" at -31.965,80.715 h1 r90
  text "D9" at -29.22,80.714 h1 r90
  text "+5V" at -159.968,78.568 h1
  text "GND" at -159.838,76.166 h1
  text "GND" at -159.738,73.666 h1
  text "+5V" at -158.668,68.732 h1 r90
  text "DUART" at -130.684,67.265 h2 r90
  text "3.6864-MHZ CLOCK" at -97.516,66.964 h1
  text "+3V3" at -158.665,59.606 h1 r90
  text "LOW RAM" at 18.223,56.681 h2
  text "HIGH RAM" at -35.864,56.431 h2
  text "LOW ROM" at -49.681,46.663 h2 r90
  text "HIGH ROM" at -16.681,45.826 h2 r90
  text "CPU" at -89.604,45.681 h2
  text "8-MHZ CLOCK" at -130.464,43.161 h1 r90
  text "TMS" at -158.372,21.216 h1
  text "TDI" at -158.057,18.723 h1
  text "TDO" at -158.412,16.216 h1
  text "TCK" at -158.362,13.716 h1
  text "GND" at -158.438,10.966 h1
  text "+3V3" at -159.094,8.465 h1
  text "A12" at 16.78,-8.675 h1 r90
  text "A7" at 24.284,-8.776 h1 r90
  text "A11" at 19.029,-9.389 h1 r90
  text "A17" at 11.534,-9.428 h1 r90
  text "A15" at 14.034,-9.424 h1 r90
  text "A9" at 21.53,-9.53 h1 r90
  text "A1" at 31.279,-9.738 h1 r90
  text "A5" at 26.784,-9.772 h1 r90
  text "A3" at 29.285,-9.767 h1 r90
  text "RESET" at -158.966,-12.42 h1 r90
  text "A8" at 24.285,-17.53 h1 r90
  text "A6" at 26.784,-17.53 h1 r90
  text "A4" at 29.28,-17.529 h1 r90
  text "A2" at 31.78,-17.524 h1 r90
  text "A18" at 11.785,-18.181 h1 r90
  text "A16" at 14.284,-18.182 h1 r90
  text "A14" at 16.78,-18.18 h1 r90
  text "A12" at 19.28,-18.175 h1 r90
  text "A10" at 21.785,-18.182 h1 r90
  text "GEORGE YACOUBIAN / LETU SU 2024 / GeorgeOS Single Board Computer / REV 3" at -64.963,-18.56 h2
B.SilkS:
  text "{dblquote}Therefore, if anyone is in Christ,  / he is a new creation. The old has  / passed away; behold, the new has come.{dblquote}  / - 2 Corinthians 5:17" at -52.088,-18.786 h2

## Text inside footprints (layer, text, board x,y; h text height)
J4: F.SilkS "*" at -158.653,82.19 h1 r270
J6: F.SilkS "*" at -152.666,84.347 h1
J7: F.SilkS "*" at -101.476,84.347 h1
J8: F.SilkS "*" at -130.768,88.919 h1
U1: F.SilkS "*" at -128.372,25.883 h1; F.Fab "*" at -127.552,25.578 h1; F.Fab "*" at -127.552,25.578 h1
U2: F.SilkS "*" at -25.982,13.449 h1; F.SilkS "*" at -25.982,13.449 h1; F.Fab "*" at -26.871,14.833 h1; F.Fab "*" at -26.871,14.833 h1
U3: F.SilkS "*" at 28.018,13.949 h1; F.SilkS "*" at 28.018,13.949 h1; F.Fab "*" at 27.129,15.333 h1; F.Fab "*" at 27.129,15.333 h1
U4: F.SilkS "*" at -53.222,13.449 h1; F.SilkS "*" at -53.222,13.449 h1; F.Fab "*" at -54.111,14.833 h1; F.Fab "*" at -54.111,14.833 h1
U5: F.SilkS "*" at 0.948,13.909 h1; F.SilkS "*" at 0.948,13.909 h1; F.Fab "*" at 0.059,15.293 h1; F.Fab "*" at 0.059,15.293 h1
U6: F.SilkS "*" at -115.272,73.933 h1; F.SilkS "*" at -116.072,73.933 h1; F.Fab "*" at -115.952,73.778 h1; F.Fab "*" at -115.952,73.778 h1